# EAGLE board BMS(board layout version) (EAGLE 7.6.0)

Size 160 x 100 mm. Coordinates in mm from the lower left corner, seen from the top.
Outline: 0,0 160,0 160,100 0,100 0,0
Copper layers (1*16): Top 0.035mm / dielectric 1.5mm / Bottom 0.035mm
Design rules "default": minimum track width 10mil, minimum drill 24mil, track to track 8mil, track to pad 8mil, pad to pad 8mil, via to via 8mil, smd to smd 8mil, copper to edge 40mil, drill to drill 8mil, minimum pad ring 10mil, minimum via ring 8mil, stop-mask expansion 4mil, vias tented up to drill 0mil, thermal gap 10mil

## Footprints (pad centres in the part's own frame; a part is rotated, then mirrored left to right if it is on the bottom)
C0805 = smd 1.3 x 1.5: 1 -0.95,0; 2 0.95,0
CONNECTOR_1 = drill 1.1 square: 1 0,0; 2 2.5,5
CHIPLED_1206 = smd 1.5 x 1.5: A 0,-1.75; C 0,1.75
R0805 = smd 1.3 x 1.5: 1 -0.95,0; 2 0.95,0
SOT-23-6 = smd 0.482 x 1.473: P$1 -0.95,-1.181; P$2 0,-1.181; P$3 0.95,-1.181; P$4 0.95,1.181; P$5 0,1.181; P$6 -0.95,1.181
8-SOIC = smd 1.5 x 0.55: P$1 -2.7,1.905; P$2 -2.7,0.635; P$3 -2.7,-0.635; P$4 -2.7,-1.905; P$5 2.7,-1.905; P$6 2.7,-0.635; P$7 2.7,0.635; P$8 2.7,1.905
SOT23-3 = smd 0.8 x 0.9: P$1 -0.95,-1; P$2 0,1; P$3 0.95,-1
TSOP-8 = smd 1.016 x 0.356: P$1 -2.82,0.992; P$2 -2.82,0.331; P$3 -2.82,-0.331; P$4 -2.82,-0.992; P$5 2.82,-0.992; P$6 2.82,-0.331; P$7 2.82,0.331; P$8 2.82,0.992

## Placement (x,y rotation side)
C1  [C0805]  12.7,25.4 0 top
C2  [C0805]  8.89,20.32 0 top
DOWN  CONN_1  [CONNECTOR_1]  50.8,64.77 0 top
LED1  [CHIPLED_1206]  36.83,48.26 0 top
LED2  [CHIPLED_1206]  31.75,48.26 180 top
NEG  CONN_1  [CONNECTOR_1]  10.16,52.07 0 top
POS  CONN_1  [CONNECTOR_1]  40.64,66.04 0 top
R1  1K  [R0805]  22.86,33.02 0 top
R2  10K  [R0805]  55.88,34.29 270 top
R3  1K  [R0805]  55.88,21.59 90 top
R4  10  [R0805]  30.48,29.21 0 top
R5  10K  [R0805]  78.74,16.51 90 top
R6  10K  [R0805]  44.45,41.91 270 top
R7  10  [R0805]  66.04,49.53 0 top
R8  10k  [R0805]  83.82,27.94 0 top
R9  1k  [R0805]  96.52,29.21 0 top
R10  1k  [R0805]  83.82,41.91 0 top
R11  10k  [R0805]  48.26,45.72 90 top
R12  2.7  [R0805]  71.12,53.34 0 top
U$1  23-T  [SOT-23-6]  72.39,48.26 270 top
U$2  ATMEL285-1.2  [8-SOIC]  20.32,49.53 0 top
U$3  KSW  [SOT23-3]  55.88,13.97 0 top
U$4  RRW  [SOT23-3]  34.29,39.37 0 top
U$5  T45V-10X-UP  [TSOP-8]  36.83,21.59 0 top
UP  CONN_1  [CONNECTOR_1]  66.04,66.04 0 top

## Library data of the parts
C1 C2 R1-R12 = resistor
DOWN NEG POS UP = formula electric
LED1 LED2 = led
U$1-U$5 = BMS Lbr; OC_NEWARK: unknown

## Nets
DOWN: DOWN.1 R1.1 R2.2
GND: C1.2 C2.2 LED1.C LED2.A NEG.1 R8.1 U$1.P$4 U$2.P$4 U$3.P$3 U$4.P$3 U$5.P$4
N$3: R4.2 U$1.P$3
N$4: R3.1 U$3.P$2
N$6: R2.1 U$5.P$5
N$7: R5.2 U$5.P$2
N$8: C2.1 R5.1 R6.1 U$2.P$8
N$9: R12.2 U$1.P$1 U$1.P$2 U$1.P$5 U$1.P$6
N$10: R4.1 R8.2 R9.2 U$5.P$3
N$11: LED1.A R9.1
N$12: LED2.C R10.1
N$13: POS.1 R7.1 R12.1
N$14: R10.2 U$5.P$7
N$15: U$3.P$1 U$5.P$6
N$16: R11.1 U$5.P$1
UP: R3.2 UP.1
VCC: C1.1 R1.2 R6.2 R7.2 R11.2 U$4.P$1 U$4.P$2 U$5.P$8

## Tracks (layer width: path | path; a pad name or v marks a point on that pad's centre or on a via)
DOWN  (2 unrouted)
GND  (10 unrouted)
N$3  (1 unrouted)
N$4  (1 unrouted)
N$6  (1 unrouted)
N$7  (1 unrouted)
N$8  (3 unrouted)
N$9  (4 unrouted)
N$10  (3 unrouted)
N$11  (1 unrouted)
N$12  (1 unrouted)
N$13  (2 unrouted)
N$14  (1 unrouted)
N$15  (1 unrouted)
N$16  (1 unrouted)
UP  (1 unrouted)
VCC  (7 unrouted)